# Altium PCB MotherBoard.PcbDoc
Units mil, origin at the board's own origin, x right, y up, seen from the top; angles counter-clockwise.
Board outline 3937.01 x 3937.01 mil, 4 copper layers (Top Layer, GND, PWR, Bottom Layer), stack 23.756 mil thick; 54 components, 56 nets, 271 pads, 66 vias.
Unrouted connection lines stored in the file: 16.
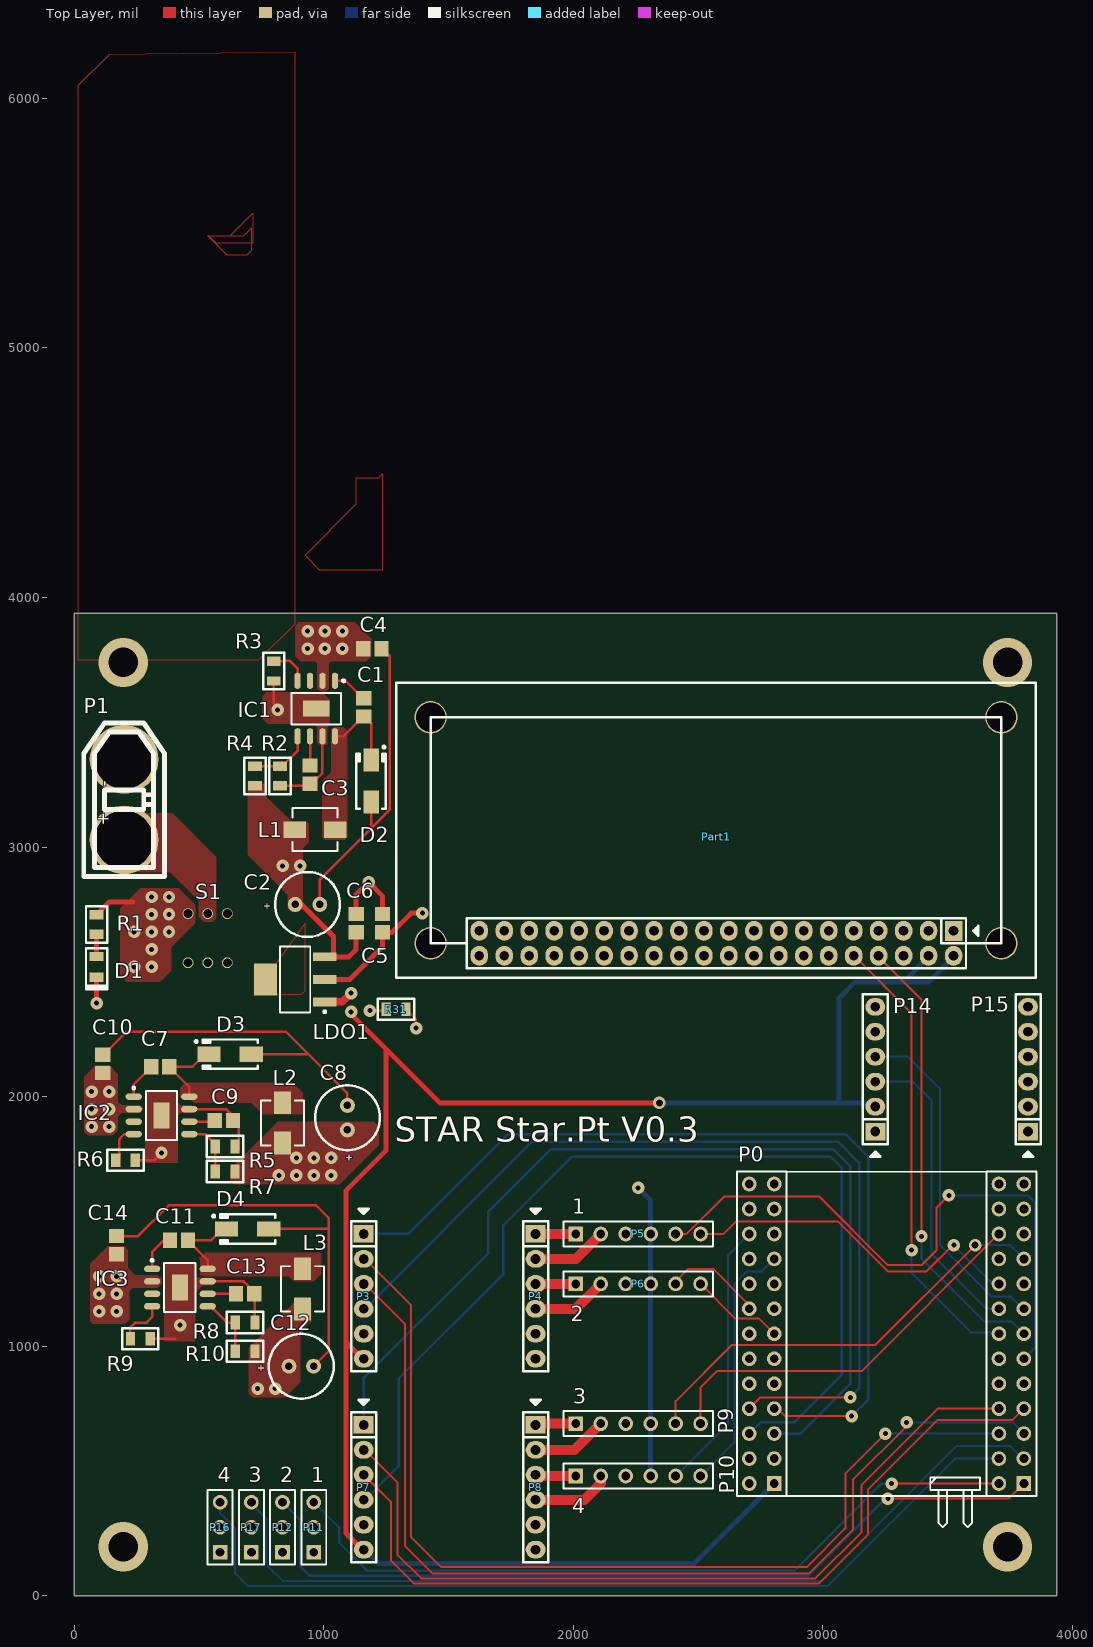
[diagram p0: Top Layer view]
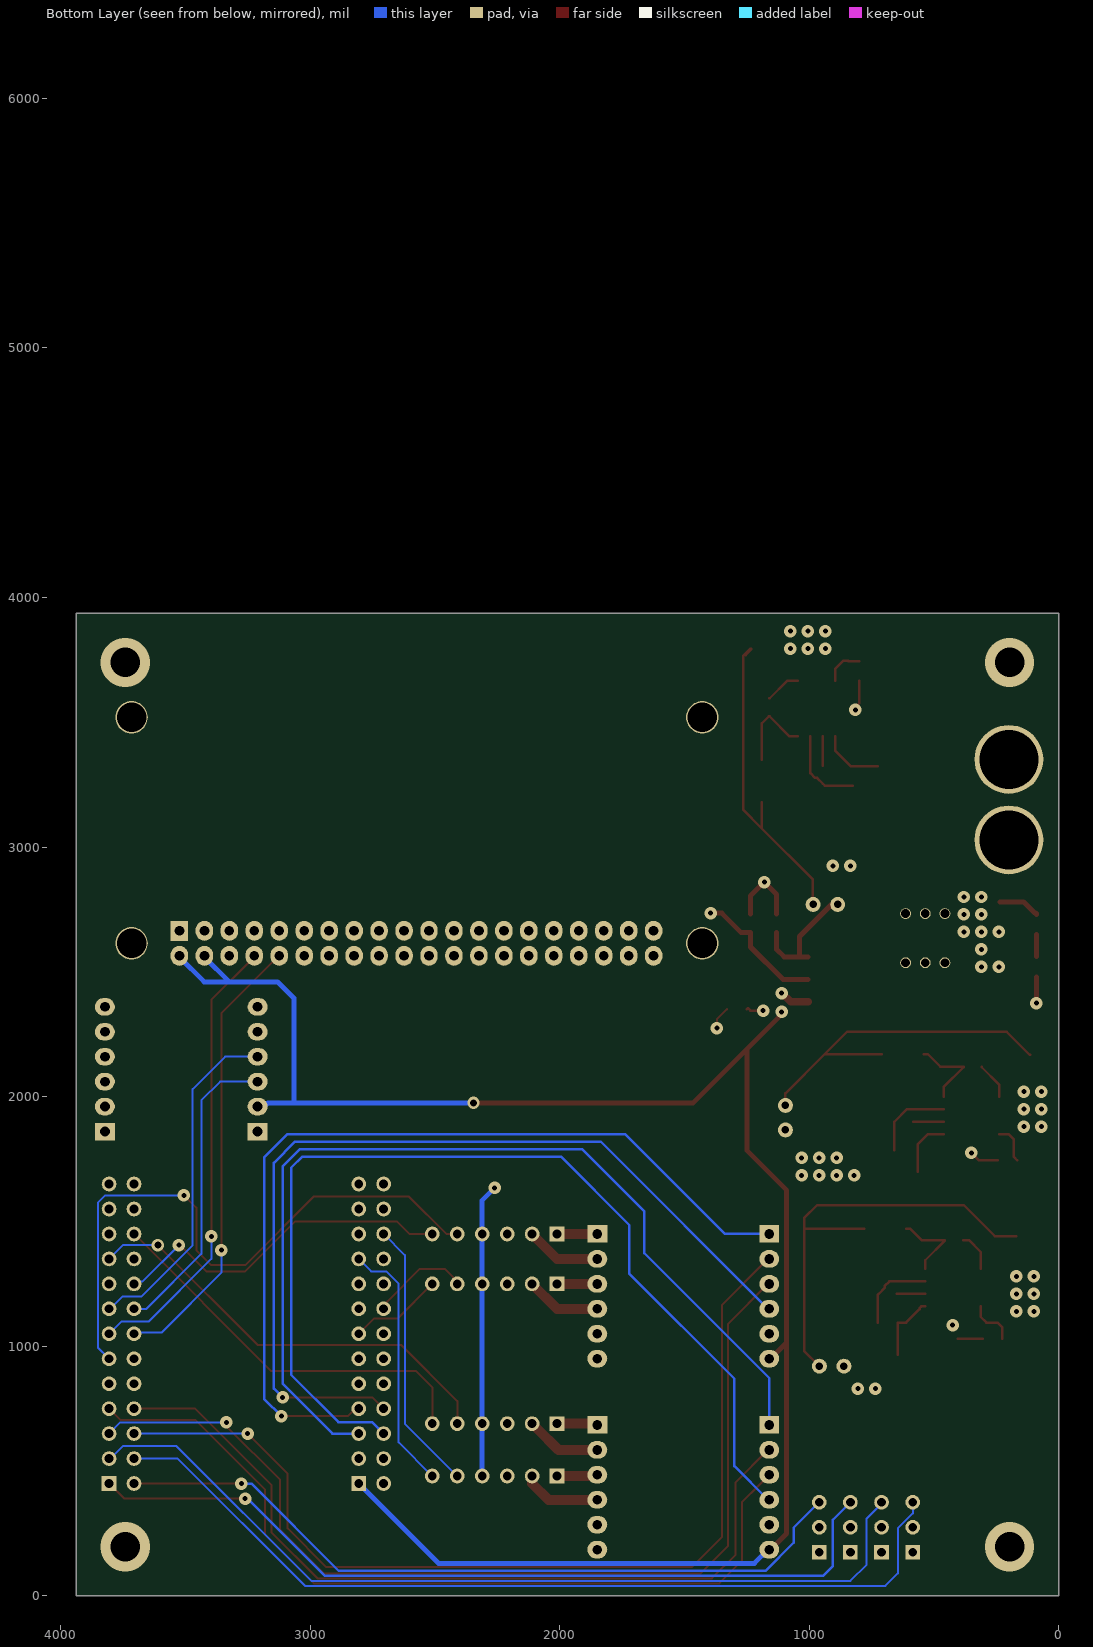
[diagram p1: Bottom Layer view, seen from below]
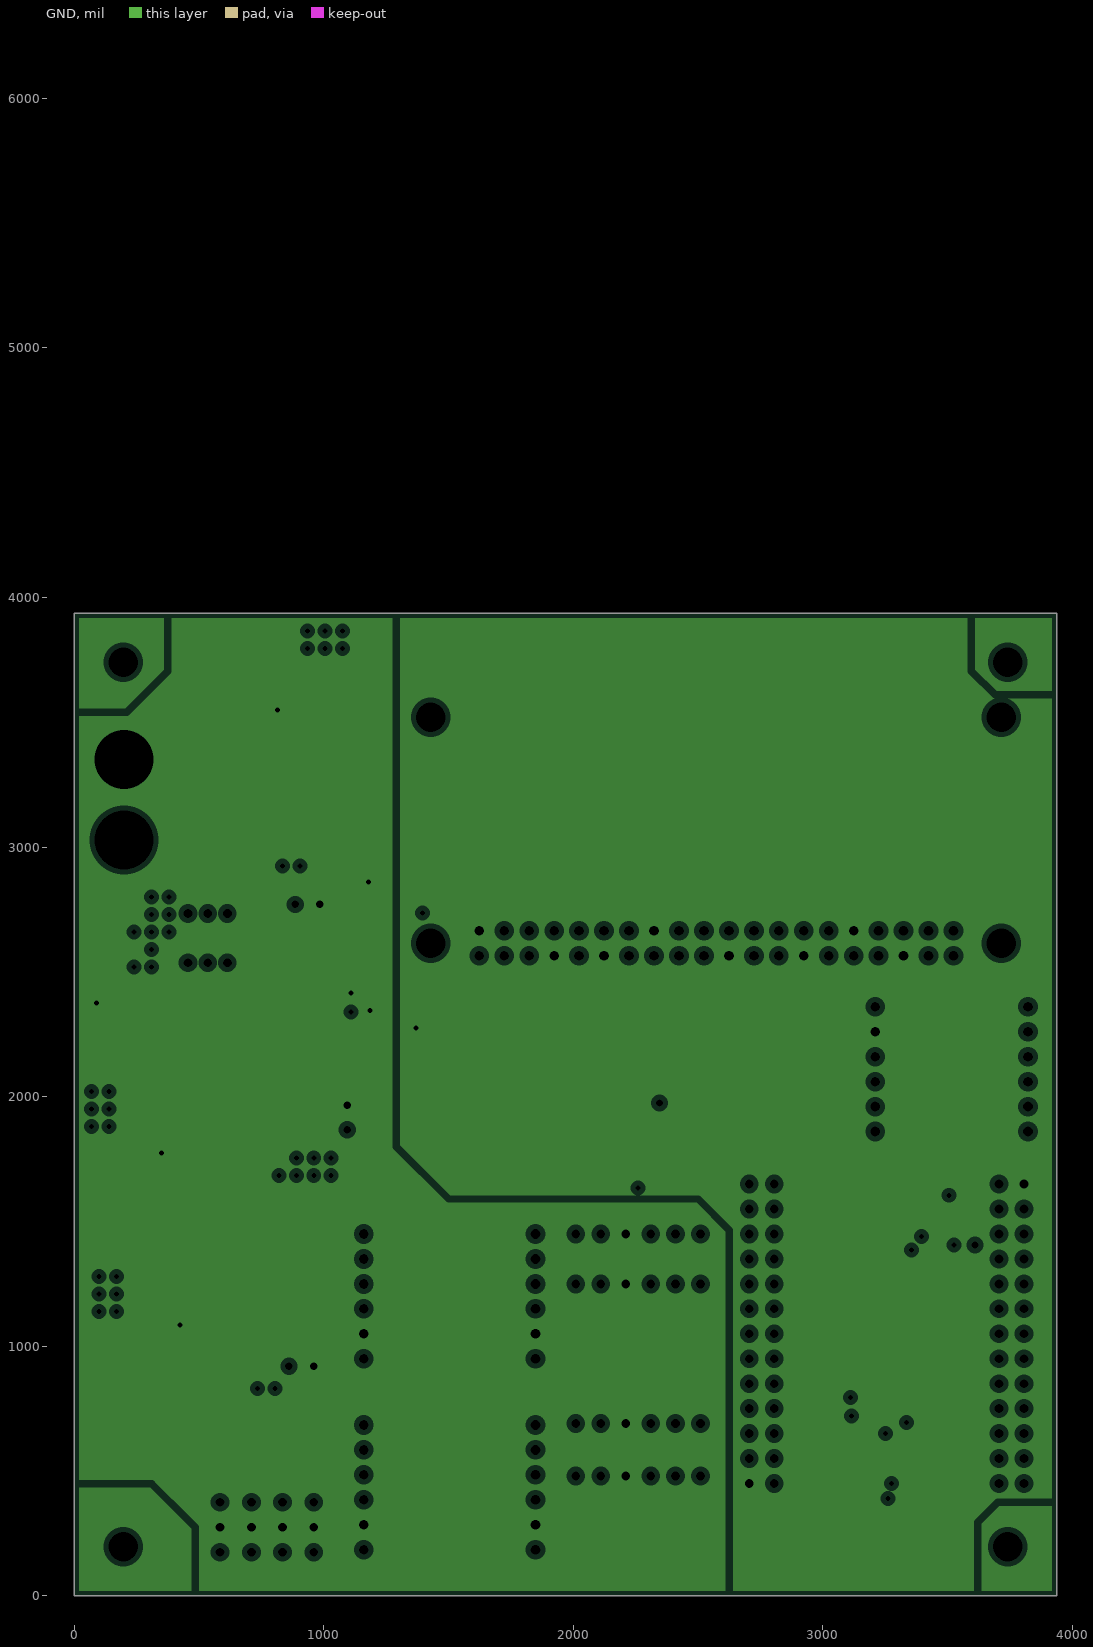
[diagram p2: GND, clearances drawn from the general rule]
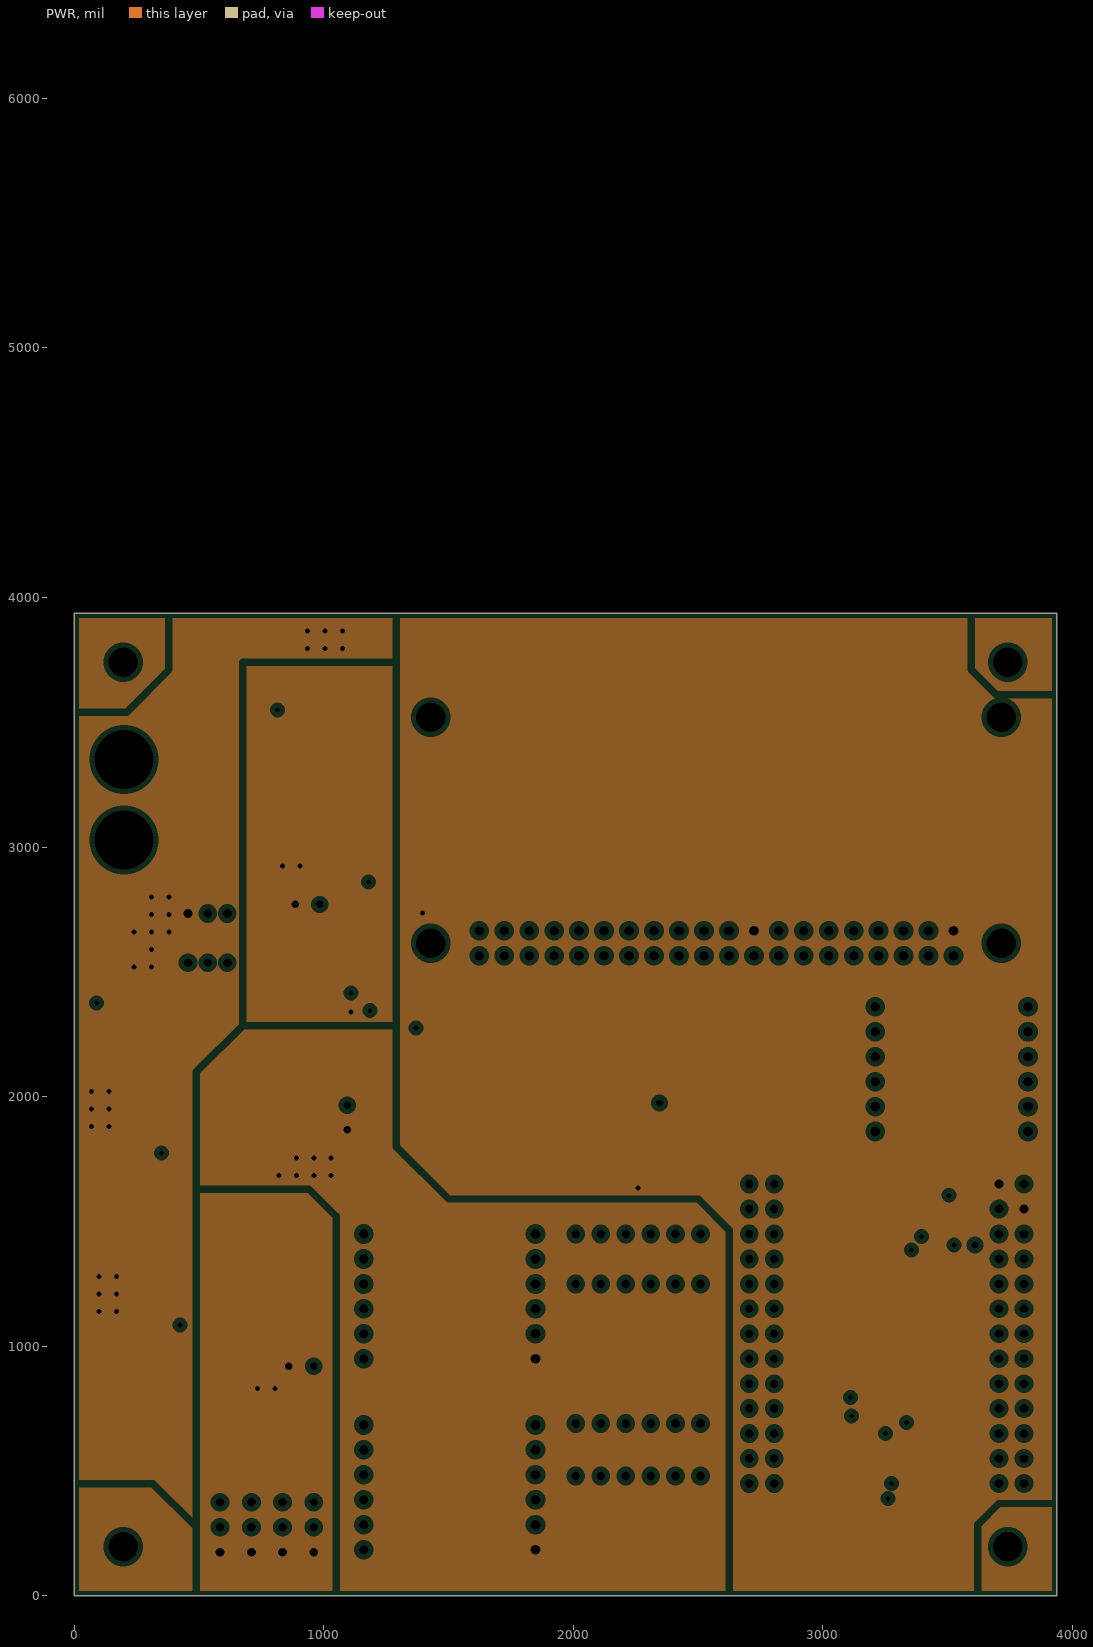
[diagram p3: PWR, clearances drawn from the general rule]
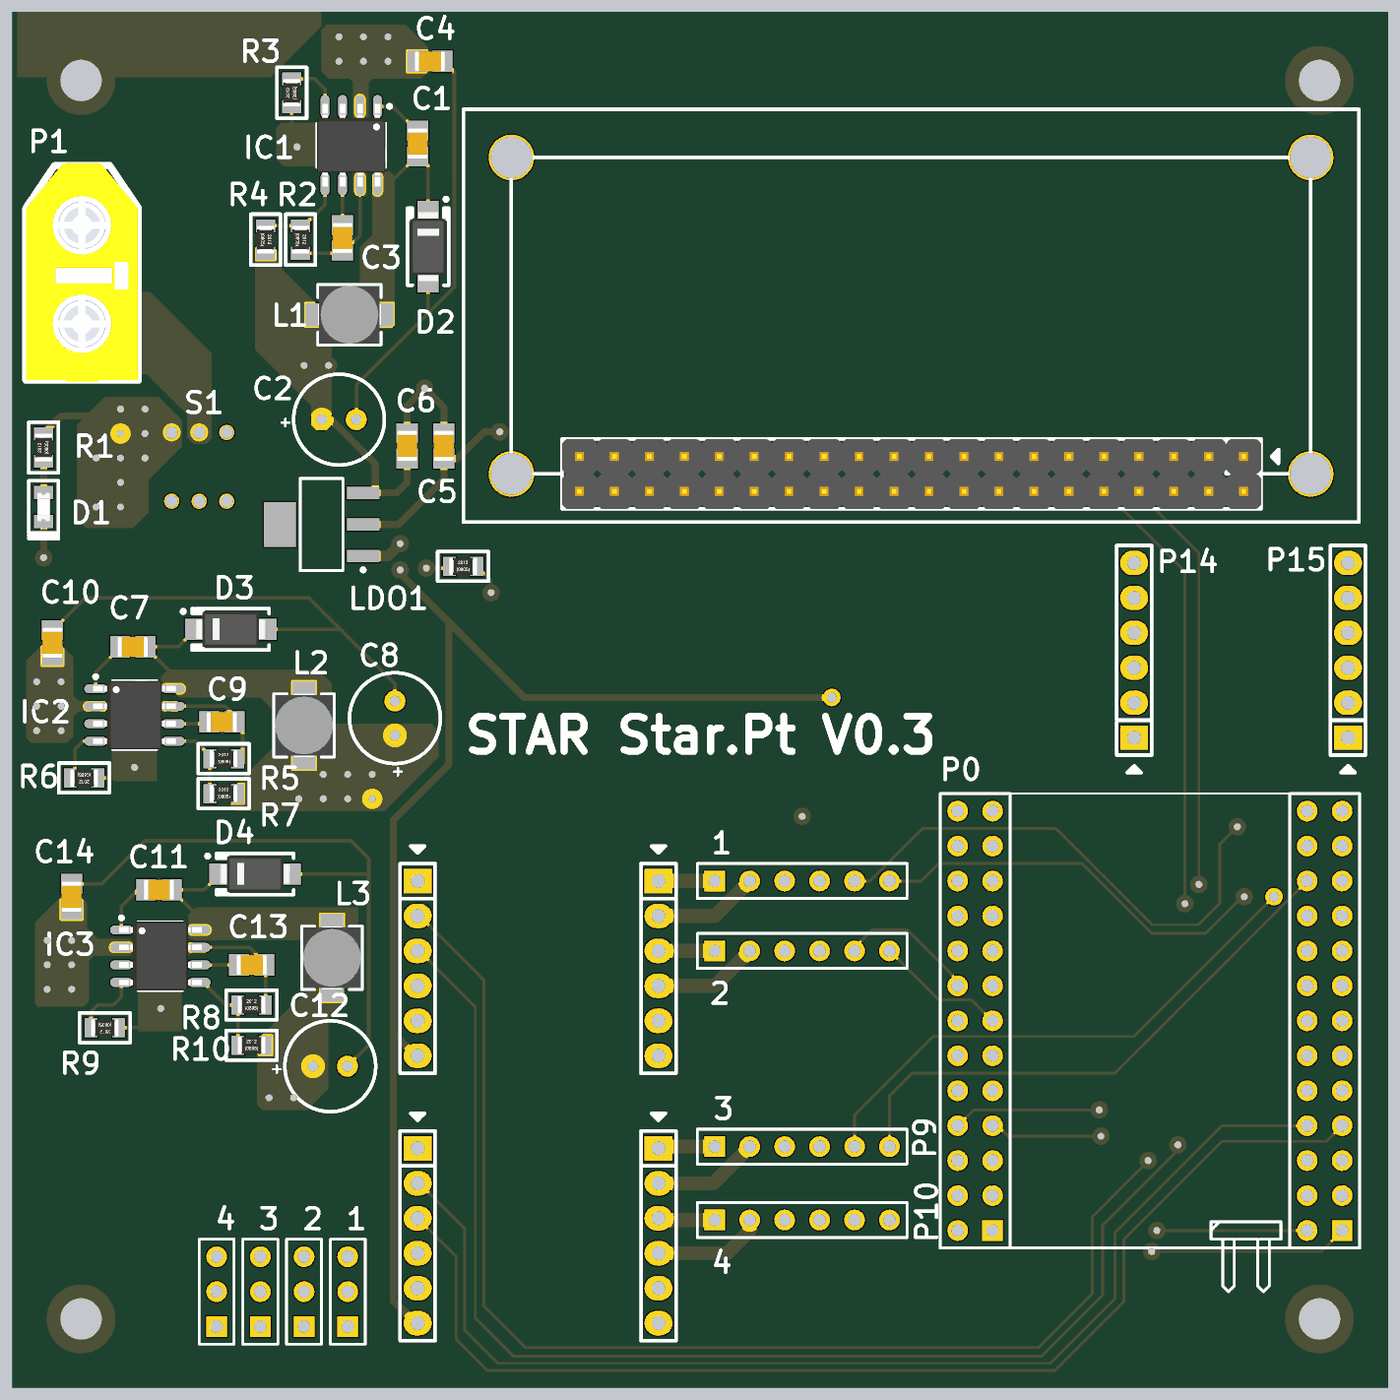
[diagram p4: 3D render of the assembled board from above, using the file's embedded part models]

## Layer stack, top to bottom
Top Solder: solder mask 0.4, Solder Resist, Dk 3.5
Top Layer: signal copper 1.4
Dielectric 2: prepreg 2.8, PP-006, Dk 4.1
GND: plane copper 1.378, net (Multiple Nets)
Dielectric 1: dielectric 12.6, FR-4, Dk 4.8
PWR: plane copper 1.378, net (Multiple Nets)
Dielectric 3: prepreg 2.8, PP-006, Dk 4.1
Bottom Layer: signal copper 1.4
Bottom Solder: solder mask 0.4, Solder Resist, Dk 3.5

## Board outline
0,0 3937.01,0 3937.01,3937.01 0,3937.01

## Design rules (kind name [scope] priority, off if disabled: settings)
Clearance [All] p1: gap=6 ignorepadtopadclearanceinfootprint=FALSE except(0: Arc-Hole Track-Hole SMDPad-Hole THPad-Hole Via-Hole Fill-Hole Poly-Hole Region-Hole Text-Hole)
HoleSize [All] p1: absolutevalues=TRUE maxlimit=300 minlimit=12 maxpercent=80.000 minpercent=20.000
HoleToHoleClearance [All] p1: gap=6 allowstackedmicrovias=TRUE
MinimumSolderMaskSliver [All] p1: minsoldermaskwidth=6
PlaneClearance [All] p1: clearance=20
PlaneConnect [All] p1: planeconnectstyle=Direct reliefexpansion=20 reliefentries=4 reliefconductorwidth=10 reliefairgap=10
PolygonConnect [All] p1: connectstyle=Direct reliefconductorwidth=10 reliefentries=4 polygonreliefangle="90 Angle" airgapwidth=10
RoutingVias [All] p1: holewidth=12 width=20 viastyle="Through Hole" minholewidth=12 minwidth=20 maxholewidth=150 maxwidth=150
SilkToSilkClearance [All] p1: silktosilkclearance=0
SilkToSolderMaskClearance [IsPad] p1: minsilkscreentomaskgap=0 clearancetoexposedcopper=TRUE
SolderMaskExpansion [All] p1: expansion=4 istentingtop=FALSE
UnRoutedNet [All] p1: checkbadconnections=TRUE
Width [All] p1: maxlimit=50 minlimit=8 preferedwidth=8 minimp=50.000000 maximp=50.000000 favimp=50.000000
22 further rules are at their usual default settings.

## Components (designator, comment, footprint, x,y, rotation, side; value= is the part's Value field where it differs from the comment)
C1 "0.1uF" CAPC2012X10M 1160,3560 r270 top
C2 "120uF" "CAP 6.3x15" 935,2770 r0 top
C3 "22nF" CAPC2012X10M 945,3290 r270 top
C4 "100nF" CAPC2012X10M 1195,3795 r180 top
C5 "10uF" CAPC2012X10M 1235,2695 r270 top
C6 "10uF" CAPC2012X10M 1130,2695 r270 top
C7 "0.1uF" CAPC2012X10M 345,2120 r0 top
C8 "120uF" "CAP 6.3x15" 1095,1915.79 r90 top
C9 "22nF" CAPC2012X10M 600,1905 r0 top
C10 "100nF" CAPC2012X10M 115,2131.42 r270 top
C11 "0.1uF" CAPC2012X10M 420,1425 r0 top
C12 "120uF" "CAP 6.3x15" 910,920 r0 top
C13 "22nF" CAPC2012X10M 685,1210 r0 top
C14 "100nF" CAPC2012X10M 170,1405 r270 top
D1 "LED" LED-0805 90,2520 r270 top
D2 "DIODE SCHOTTKY" SMA 1190,3264.65 r90 top
D3 "DIODE SCHOTTKY" SMA 625,2170 r180 top
D4 "DIODE SCHOTTKY" SMA 695,1470 r180 top
IC1 "LMR14050SDDA" SOP127P600X170_HS-9M 970,3555 r270 top
IC2 "LMR14050SDDA" SOP127P600X170_HS-9M 350,1925 r0 top
IC3 "LMR14050SDDA" SOP127P600X170_HS-9M 423.78,1235 r0 top
L1 "10uH" INDP4442X20M 965,3070 r180 top
L2 "10uH" INDP4442X20M 835,1895 r270 top
L3 "10uH" INDP4442X20M 915,1230 r270 top
LDO1 "AMS1117 3.3V" SOT230P700X180-4M 885,2470 r180 top
P0 "MHDR2X26" PCBComponent_1 3255,1050 r0 top locked
P1 "XT60" XT60H-F 200,3190 r270 top
P3 "MHDR1X6" MPIN-6-2.54-1.0 1160,1200 r270 top
P4 "MHDR1X6" MPIN-6-2.54-1.0 1849,1200 r270 top
P5 "Header 6" HDR1X6 2010,1450 r0 top
P6 "Header 6" HDR1X6 2010,1250 r0 top
P7 "MHDR1X6" MPIN-6-2.54-1.0 1160,435 r270 top
P8 "MHDR1X6" MPIN-6-2.54-1.0 1849,435 r270 top
P9 "Header 6" HDR1X6 2010,690 r0 top
P10 "Header 6" HDR1X6 2010,480 r0 top
P11 "Header 3" HDR1X3 960,175 r90 top
P12 "Header 3" HDR1X3 835,175 r90 top
P14 "MHDR1X6" MPIN-6-2.54-1.0 3210,2110 r90 top
P15 "MHDR1X6" MPIN-6-2.54-1.0 3821.81,2110 r90 top
P16 "Header 3" HDR1X3 585,175 r90 top
P17 "Header 3" HDR1X3 710,175 r90 top
Part1 "Zero2W" Zero2W 2573.27,2614.49 r0 top
R1 "5.7K" 0805 90,2690 r90 top
R2 "1K" 0805 825,3285 r270 top
R3 "84.5K" 0805 800,3705 r90 top
R4 "5.7K" 0805 725,3285 r270 top
R5 "1K" 0805 605,1800 r0 top
R6 "84.5K" 0805 205.63,1745 r180 top
R7 "15K" 0805 605,1700 r0 top
R8 "1K" 0805 685,1095 r0 top
R9 "84.5K" 0805 265,1030 r180 top
R10 "6.73K" 0805 685,980 r0 top
R31 "0R" 0805 1290,2350 r0 top
S1 "KFT DIP-7X7" "7X7 DIP" 535,2635 r90 top

## Footprints (in the part's own frame and the unit in brackets; to place one, negate y for a bottom-side part, rotate by r counter-clockwise, add the part's x,y. Pads: shape width x height; smd on the part's side, far side on the other; paste and mask are expansions set on the pad)
"7X7 DIP" [mm]
  round 1.1 hole 0.9: 1(2.5,2) 2(2.5,0) 3(2.5,-2) 4(-2.5,-2) 5(-2.5,0) 6(-2.5,2)
  body extent -3,-3 3,3, height 12
0805 [mm] "SMD, 0805"
  rect 0.95x1.4 smd: 1(-1,0) 2(1,0)
  silkscreen extent -1.85,-1.08 1.85,1.08, body extent -1,-0.62 1,0.63, height 0.45
"CAP 6.3x15" [mil]
  round 60 hole 30: 1(-49.21,0) 2(49.21,0)
  silkscreen extent -130,-130 130,130, body extent -124,-124 124,124, height 591
CAPC2012X10M [mm] "Chip Capacitor, 2-Leads, Body 2.00x1.25mm, IPC Low Density"
  rect 1.45x1.55 smd: 1(-0.925,0) 2(0.925,0)
  body extent -1.1,-0.72 1.1,0.72, height 1
HDR1X3 [mm] "Connector; Header; 3 Position"
  rect 1.5x1.5 hole 0.9: 1(0,0)
  round 1.5 hole 0.9: 2(2.54,0) 3(5.08,0)
  silkscreen extent -1.27,-1.27 6.35,1.27
HDR1X6 [mm] "Connector; Header; 6 Position"
  rect 1.5x1.5 hole 0.9: 1(0,0)
  round 1.5 hole 0.9: 2(2.54,0) 3(5.08,0) 4(7.62,0) 5(10.16,0) 6(12.7,0)
  silkscreen extent -1.27,-1.27 13.97,1.27
INDP4442X20M [mm] "Precision Wire Wound Inductor, 2-Leads, Body 4.40x4.20mm, IPC Low Density"
  rect 2.3x1.7 smd: 1(-2.05,0) 2(2.05,0)
  silkscreen extent -2.3,-2.2 2.3,2.2, body extent -2.3,-2.1 2.3,2.1, height 2.1
LED-0805 [mm] "LED, SMD, 0805"
  rect 0.95x1.4 smd: 1(-1.05,0) 2(1.05,0)
  silkscreen extent -1.9,-1.08 2.3,1.08, body extent -1.03,-0.46 1.03,0.45, height 0.85
MPIN-6-2.54-1.0 [mil] "MHDR"
  rect 70x80 hole 39.37: 1(-250,0)
  oval 70x80 hole 39.37: 2(-150,0) 3(-50,0) 4(50,0) 5(150,0) 6(250,0)
  silkscreen extent -350,-50 300,50, body extent -295,-39 295,39, height 394
PCBComponent_1 [mm]
  round 1.5 hole 0.9: 1(-13.97,15.24) 2(-11.43,15.24) 3(-13.97,12.7) 4(-11.43,12.7) 5(-13.97,10.16) 6(-11.43,10.16) 7(-13.97,7.62) 8(-11.43,7.62) 9(-13.97,5.08) 10(-11.43,5.08) 11(-13.97,2.54) 12(-11.43,2.54) 13(-13.97,0) 14(-11.43,0) 15(-13.97,-2.54) 16(-11.43,-2.54) 17(-13.97,-5.08) 18(-11.43,-5.08) 19(-13.97,-7.62) 20(-11.43,-7.62) 21(-13.97,-10.16) 22(-11.43,-10.16) 23(-13.97,-12.7) 24(-11.43,-12.7) 25(-13.97,-15.24) 27(11.43,15.24) 28(13.97,15.24) 29(11.43,12.7) 30(13.97,12.7) 31(11.43,10.16) 32(13.97,10.16) 33(11.43,7.62) 34(13.97,7.62) 35(11.43,5.08) 36(13.97,5.08) 37(11.43,2.54) 38(13.97,2.54) 39(11.43,0) 40(13.97,0) 41(11.43,-2.54) 42(13.97,-2.54) 43(11.43,-5.08) 44(13.97,-5.08) 45(11.43,-7.62) 46(13.97,-7.62) 47(11.43,-10.16) 48(13.97,-10.16) 49(11.43,-12.7) 50(13.97,-12.7) 51(11.43,-15.24)
  rect 1.5x1.5 hole 0.9: 26(-11.43,-15.24) 52(13.97,-15.24)
  silkscreen extent -15.24,-19.68 15.24,16.51, body extent -15.11,-16.51 15.11,16.38, height 15
SMA [mm] "DO-214AC"
  rect 2.35x1.55 smd: 1(-2.15,0) 2(2.15,0)
  silkscreen extent -2.8,-1.5 3.58,1.5, body extent -2.6,-1.3 2.6,1.3, height 2.64
SOP127P600X170_HS-9M [mm] "SOP, 8-Leads, Body 4.90x3.90mm, Pitch 1.27mm, Thermal Pad 2.65x1.65mm, IPC Low Density"
  oval 1.65x0.65 smd: 1(-2.825,1.905) 2(-2.825,0.635) 3(-2.825,-0.635) 4(-2.825,-1.905) 5(2.825,-1.905) 6(2.825,-0.635) 7(2.825,0.635) 8(2.825,1.905)
  rect 1.65x2.65 smd: 9(0,0)
  silkscreen extent -2.95,-2.5 1.6,2.91, body extent -3,-2.5 3,2.5, height 1.7
SOT230P700X180-4M [mm] "SOT223, 4-Leads, Body 6.50x7.00mm (avg), Pitch 2.30mm, IPC Low Density"
  rect 2.35x0.9 smd: 1(-3.025,2.3) 2(-3.025,0) 3(-3.025,-2.3)
  rect 2.35x3.25 smd: 4(3.025,0)
  silkscreen extent -3.15,-3.35 1.55,3.42, body extent -1.85,-3.35 1.85,3.35, height 1.8
XT60H-F [mm] "XT60H-锟斤拷头-锟斤拷锟斤拷"
  round 7 hole 6: 1(-4.1,0) 2(4.1,0)
  silkscreen extent -7.8,-4.1 7.8,4.1, body extent -8,-4.09 7.9,4.06, height 16.5
Zero2W [mil]
  round 129.92 hole 118.11: 0(-1145,0) 0(-1145,905.51) 0(1141.73,0) 0(1141.73,905.51)
  rect 70x80 hole 39.37: 1(950,50)
  oval 70x80 hole 39.37: 2(950,-50) 3(850,50) 4(850,-50) 5(750,50) 6(750,-50) 7(650,50) 8(650,-50) 9(550,50) 10(550,-50) 11(450,50) 12(450,-50) 13(350,50) 14(350,-50) 15(250,50) 16(250,-50) 17(150,50) 18(150,-50) 19(50,50) 20(50,-50) 21(-50,50) 22(-50,-50) 23(-150,50) 24(-150,-50) 25(-250,50) 26(-250,-50) 27(-350,50) 28(-350,-50) 29(-450,50) 30(-450,-50) 31(-550,50) 32(-550,-50) 33(-650,50) 34(-650,-50) 35(-750,50) 36(-750,-50) 37(-850,50) 38(-850,-50) 39(-950,50) 40(-950,-50)
  silkscreen extent -1283,-138 1280,1043, body extent -1000,-100 1000,100, height 398

## Part data
C1: library part Cap, "Capacitor 0.1uF", LatestRevisionDate=17-Jul-2002, LatestRevisionNote="Re-released for DXP Platform.", PackageDescription="Radial Cap, Thru-Hole; 2 Leads; 0.3 in Pin Spacing", PackageReference=RAD-0.3, Published=8-Jun-2000, Publisher="Altium Limited"
C2 C8 C12: library part "Cap Pol", "Polarized Capacitor (Radial)", LatestRevisionDate=17-Jul-2002, LatestRevisionNote="Re-released for DXP Platform.", PackageDescription="Polarized Capacitor (Radial); 2 Leads", PackageReference=RB7.6-15, Published=8-Jun-2000, Publisher="Altium Limited"
C3 C4 C5 C6 C7 C9 C10 C11 C13 C14: library part Cap, "Capacitor", LatestRevisionDate=17-Jul-2002, LatestRevisionNote="Re-released for DXP Platform.", PackageDescription="Radial Cap, Thru-Hole; 2 Leads; 0.3 in Pin Spacing", PackageReference=RAD-0.3, Published=8-Jun-2000, Publisher="Altium Limited"
D2 D3 D4: "肖特基二极管"
L1 L2 L3: library part Inductor, "Inductor", Code_IEC=1005, Code_JEITA=0402, LatestRevisionDate=29-May-2009, LatestRevisionNote="IPC-7351 Footprint Added.", PackageDescription="Chip Inductor", PackageReference=0402-A, Published=8-Jun-2000, Publisher="Altium Limited"
P0: "Header, 52-Pin, Dual row", LatestRevisionDate=17-Jul-2002, LatestRevisionNote="Re-released for DXP Platform.", Publisher="Altium Limited"
P3 P4 P5 P6 P7 P8 P9 P10 P14 P15: "Header, 6-Pin", LatestRevisionDate=17-Jul-2002, LatestRevisionNote="Re-released for DXP Platform.", Publisher="Altium Limited"
P11 P12 P16 P17: "Header, 3-Pin", LatestRevisionDate=17-Jul-2002, LatestRevisionNote="Re-released for DXP Platform.", Publisher="Altium Limited"
R1 R2 R3 R4 R5 R6 R7 R8 R9 R10 R31: library part Res, "Resistor", LatestRevisionDate=17-Jul-2002, LatestRevisionNote="Re-released for DXP Platform.", PackageDescription="Axial Device, Thru-Hole; 2 Leads; 0.4 in Pin Spacing", PackageReference=AXIAL-0.4, Published=8-Jun-2000, Publisher="Altium Limited"

## Via types
v1: diameter 50/50 (per signal layer), hole 20, Top Layer to Bottom Layer, tented both sides, 58 vias
v2: diameter 196.85, hole 118.11, Top Layer to Bottom Layer, tented both sides, 4 vias
v3: diameter 50, hole 28, Top Layer to Bottom Layer, 2 vias
v4: diameter 50/50 (per signal layer), hole 20, Top Layer to Bottom Layer, 2 vias

## Nets (pads, with @x,y where several pads share a name; then routed paths per layer and width w, separated by ;. In a path a pad name is that pad's centre, name@x,y a point inside that pad or via, vN(x,y) a via of type N, cw(c..) or ccw(c..) an arc to the next point about the centre after c; other vN are vias at no path point)
+3.3: C5.2 LDO1.2 P0.27 P0.30 P5.4 P6.4 P9.4 P10.4 Part1.1 Part1.17 | length 1710.7
  Top Layer w20: LDO1.2 1105,2470 1235,2600 C5.2 1273.58,2658.58 1350,2735 v1(1395,2735)
  Bottom Layer w20: v1(2260,1635) 2310,1585 P5.4 P6.4 P9.4 P10.4
+5: C2.1 C6.2 L1.2 LDO1.3 P0.26 P3.6 P7.6 P14.2 Part1.2 Part1.4 R4.2 | length 7844.2
  Top Layer w20: C2.1@910.79,2770 1039.09,2641.69 LDO1.3@1039.09,2565 ; LDO1.3 1100.55,2560.55 1130,2590 C6.2 ; v1(1110,2340) 1110,2330 1250,2190 ; P3.6 1155,950 1090,1015 ; P7.6@1165,185 P7.6 1155,185 1090,250 1090,1015 ; v3(2345,1975) 1465,1975 1250,2190 ; P14.2@3200.43,1969.57 P14.2 ; 1090,1015 1090,1625 1250,1785 1250,2190
  Bottom Layer w20: P7.6 1165,185 1220,130 2485,130 P0.26 ; v3(2345,1975) 3065,1975 ; P14.2 3200.43,1969.57 3173.72,1969.57 3168.28,1975 3065,1975 ; Part1.4 3423.27,2559.49 3323.78,2460 ; Part1.2 3523.27,2559.49 3423.78,2460 3323.78,2460 ; 3065,1975 3065,2395 3130,2460 3323.78,2460
  other v1: 835,2925 905,2925
+6: C12.1 L3.2 P11.1 P12.1 P16.1 P17.1 R10.2
  other v1: 735,830 805,830
+12: C8.1 L2.2 P4.6 P8.6 R7.2
  other v1: 820,1685 890,1685 960,1685 890,1755 960,1755 1030,1755
  other v4: 1030,1685
"+14.7 BAT": C4.2 C10.2 C14.2 IC1.2 IC2.2 IC3.2 R1.2 S1.1 | length 168.2
  Top Layer w20: R1.2 90,2733.11 92.56,2735.67 96.3,2735.67 140.63,2780 235,2780
  other v1: 100,1140 170,1140 100,1210 170,1210 100,1280 170,1280 70,1880 140,1880 70,1950 140,1950 70,2020 140,2020 240,2520 310,2520 310,2590 240,2660 310,2660 380,2660 380,2730 310,2800 380,2800 935,3795 1005,3795 1075,3795 935,3865 1005,3865 1075,3865
  other v4: 310,2730
F103_UART4_RX: P0.40 Part1.8 | length 1819.9
  Top Layer w8: Part1.8 3223.27,2559.49 3395,2387.76 v1(3395,1440)
  Bottom Layer w8: v1(3395,1440) 3395,1350 3645,1100 3755,1100 P0.40
F103_UART4_TX: P0.39 Part1.10 | length 1818.3
  Top Layer w8: Part1.10 3125.51,2564.49 3355,2335 v1(3355,1385)
  Bottom Layer w8: v1(3355,1385) 3355,1295 3595,1055 3700,1055 P0.39
F103_UART5_RX: P0.38 P14.4 | length 1379.5
  Bottom Layer w8: P14.4 3340,2160 3470,2030 3470,1405 3675,1200 3750,1200 3800,1150 P0.38
F103_UART5_TX: P0.37 P14.3 | length 1232.2
  Bottom Layer w8: P14.3 3360,2060 3435,1985 3435,1370 3655,1150 P0.37
GND: P0.25 P0.28 P14.5 Part1.6 Part1.9 Part1.14 Part1.20 Part1.25 Part1.30 Part1.34 Part1.39 R31.2 | length 93.1
  Top Layer w8: R31.2 1330,2350.63 1370,2310.63 v1(1370,2275)
MOTOR1+: P4.1 P5.1 | length 161
  Top Layer w40: P4.1 P5.1
MOTOR1-: P4.2 P5.2 | length 302.4
  Top Layer w40: P4.2 2010,1350 P5.2
MOTOR2+: P4.3 P6.1 | length 161
  Top Layer w40: P4.3 P6.1
MOTOR2-: P4.4 P6.2 | length 302.4
  Top Layer w40: P4.4 2010,1150 P6.2
MOTOR3+: P8.1 P9.1 | length 143.1
  Top Layer w40: P8.1 1854,690 P9.1@1990,690
MOTOR3-: P8.2 P9.2 | length 276.2
  Top Layer w40: P8.2 2005,585 P9.2@2090,670
MOTOR4+: P8.3 P10.1 | length 148.1
  Top Layer w40: P8.3 1854,480 P10.1@1995,480
MOTOR4-: P8.4 P10.2 | length 302.9
  Top Layer w40: P8.4 2045,385 2110,450 P10.2@2110,465
MOTOR-DIR1: P0.20 P3.1 | length 3614.4
  Top Layer w8: P0.20 2818.82,750 2848.82,720 v1(3115,720)
  Bottom Layer w10: P3.1 1337.5,1450 1737.5,1850 3090,1850 3182.5,1757.5 3182.5,787.5 v1(3115,720)
MOTOR-DIR2: P0.19 P3.4 | length 3675.9
  Top Layer w8: P0.19 2750,795 v1(3110,795)
  Bottom Layer w10: P3.4 1165,1150 1835,1820 3060,1820 3145,1735 3145,830 v1(3110,795)
MOTOR-DIR3: P0.22 P7.1 | length 3902.5
  Bottom Layer w10: P7.1 1160,872.5 1660,1372.5 1660,1540 1910,1790 3040,1790 3110,1720 3110,850 2910,650 P0.22
MOTOR-DIR4: P0.21 P7.4 | length 4120.3
  Bottom Layer w10: P7.4 1165,385 1300,520 1300,870 1720,1290 1720,1485 1995,1760 3030.91,1760 3075,1715.91 3075,885 2886.3,696.3 2751.3,696.3 P0.21
NetC1_1: C1.1 IC1.1 | length 143.9
  Top Layer w10: IC1.1 1088.23,3666.22 1158.03,3596.42 C1.1
NetC1_2: C1.2 D2.2 IC1.8 L1.1 | length 335.9
  Top Layer w10: IC1.8 1078.23,3443.78 1158.03,3523.58 C1.2 1161.97,3523.58 1190,3495.55 D2.2
NetC3_1: C3.1 IC1.6 | length 117.4
  Top Layer w10: C3.1 IC1.6
NetC7_1: C7.1 IC2.1 | length 148.9
  Top Layer w10: IC2.1 238.78,2048.23 308.58,2118.03 C7.1
NetC7_2: C7.2 D3.2 IC2.8 L2.1 | length 332.7
  Top Layer w10: IC2.8 461.22,2038.23 381.42,2118.03 C7.2 474.61,2120 524.61,2170 D3.2
NetC9_1: C9.1 IC2.6 | length 122.4
  Top Layer w10: IC2.6 C9.1@583.58,1900
NetC11_1: C11.1 IC3.1 | length 158.2
  Top Layer w10: IC3.1 312.56,1377.56 360,1425 C11.1
NetC11_2: C11.2 D4.2 IC3.8 L3.1 | length 320.1
  Top Layer w10: IC3.8 535,1344.45 456.42,1423.03 C11.2 549.61,1425 594.61,1470 D4.2
NetC13_1: C13.1 IC3.6 | length 113.6
  Top Layer w10: IC3.6 C13.1
NetD1_1: D1.1 R1.1 | length 89.3
  Top Layer w20: D1.1 R1.1
NetIC1_4: IC1.4 R3.2 | length 157.2
  Top Layer w10: R3.2 842.61,3744.37 844.09,3745.86 864.14,3745.86 895,3715 IC1.4
NetIC1_5: IC1.5 R2.1 R4.1 | length 253.6
  Top Layer w10: R4.1 R2.1 833.86,3324.37 895,3385.51 IC1.5
NetIC2_4: IC2.4 R6.2 | length 157.3
  Top Layer w10: R6.2 179.96,1758.7 179.96,1829.1 200.86,1850 IC2.4
NetIC2_5: IC2.5 R5.1 R7.1 | length 230.3
  Top Layer w10: IC2.5 524.49,1850 565.63,1808.86 R5.1 R7.1
NetIC3_4: IC3.4 R9.2 | length 192.4
  Top Layer w10: R9.2 225.63,1075.63 245,1095 290,1095 312.56,1117.56 IC3.4
NetIC3_5: IC3.5 R8.1 R10.1 | length 269.6
  Top Layer w10: IC3.5 550.47,1160 557.67,1152.8 557.67,1149.26 611.93,1095 R8.1 R10.1@645.63,965
NetP1_2: P1.2 S1.2
PGND: C2.2 C3.2 C4.1 C5.1 C6.1 C8.2 C9.2 C10.1 C12.2 C13.2 C14.1 D1.2 D2.1 D3.1 D4.1 IC1.7 IC1.9 IC2.7 IC2.9 IC3.7 IC3.9 LDO1.1 P1.1 P3.5 P4.5 P5.3 P6.3 P7.5 P8.5 P9.3 P10.3 P11.2 P12.2 P16.2 P17.2 R2.2 R3.1 R5.2 R6.1 R8.2 R9.1 R31.1 | length 6418.9
  Top Layer w10: C10.1 116.97,2167.84 209.13,2260 848.42,2260 938.42,2170 ; C14.1 256.42,1441.42 380,1565 968.43,1565 1020,1513.43 1020,1470 ; R6.1 320,1745 v1(350,1775) ; R9.1 405,1030 ; IC2.7 608.38,1950 659.37,1899.01 R5.2@659.37,1785 ; IC3.7 678.85,1260 697.87,1240.98 697.87,1233.54 C13.2 724.37,1207.05 R8.2 ; D3.1 938.42,2170 ; D4.1 1020,1470 ; R3.1 800,3575.82 815,3560.82 v1(815,3550) ; R2.2 937.05,3245.63 C3.2 968.54,3277.13 975.98,3277.13 995,3296.15 IC1.7 ; C12.2 1020,980.79 1020,1470 ; C2.2@985,2760 985,2870 1190,3075 ; C8.2 1095,2013.42 938.42,2170 ; v1(1185,2345) 1235.63,2345 1245.63,2355 R31.1 ; D2.1 1190,3075 ; C4.1 1231.42,3793.03 C4.1@1254.96,3769.49 ; C4.1@1235,3795 1265,3765 1265,3150 1190,3075
  Top Layer w20: v1(90,2375) D1.2 ; C6.1 1130,2810 v1(1180,2860) 1235,2805 C5.1
  Top Layer w30: LDO1.1 1074.45,2379.45 v1(1110,2415)
  other v1: 425,1085
PWM-TIM8-CH1(SERVO1): P0.51 P11.3 | length 3039.1
  Top Layer w8: v1(3275,450) P0.51
  Bottom Layer w10: P11.3 1062.17,272.83 1062.17,212.78 1174.95,100 2885,100 3235,450 v1(3275,450)
PWM-TIM8-CH2(SERVO2): P0.52 P12.3 | length 3353.8
  Top Layer w8: v1(3260,390) 3745,390 P0.52
  Bottom Layer w10: P12.3 905,305 905,120 945,80 2940,80 3250,390 v1(3260,390)
PWM-TIM8-CH3(SERVO3): P0.49 P16.3 | length 3601.8
  Bottom Layer w8: P16.3 585,330.9 645,270.9 645,90 695,40 3020,40 3530,550 P0.49
PWM-TIM8-CH4(SERVO4): P0.50 P17.3 | length 3581.2
  Bottom Layer w8: P17.3 710,370 770,310 770,125 835,60 2995,60 3535,600 3750,600 3800,550 P0.50
"TIM1-CH1 PWM MOTOR1": P0.47 P3.2 | length 3951.8
  Top Layer w8: P3.2 1165,1350 1350,1165 1350,235 1470,115 2935,115 3090,270 3090,490 v1(3250,650)
  Bottom Layer w8: v1(3250,650) P0.47
"TIM1-CH2 PWM MOTOR2": P0.48 P3.3 | length 4042
  Top Layer w8: P3.3 1165,1250 1325,1090 1325,200 1435,90 2945,90 3120,265 3120,465 3335,680 v1(3335,695)
  Bottom Layer w8: v1(3335,695) 3760,695 P0.48
"TIM1-CH3 PWM MOTOR3": P0.45 P7.2 | length 3321.2
  Top Layer w8: P7.2 1165,585 1295,455 1295,165 1390,70 2970,70 3155,255 3155,445 3460,750 P0.45
"TIM1-CH4 PWM MOTOR4": P0.46 P7.3 | length 3358.2
  Top Layer w8: P7.3 1200.82,444.18 1270,375 1270,140 1360,50 2985,50 3180,245 3180,425 3460,705 3760,705 P0.46
"TIM2-CH1 M1 CODER A": P0.42 P5.5 | length 2487.7
  Top Layer w8: P5.5 2454.1,1450 2604.1,1600 2985,1600 3260,1325 3395,1325 3455,1385 3455,1555 v1(3505,1605)
  Bottom Layer w8: v1(3505,1605) 3820,1605 3850,1575 3850,995 P0.42
"TIM2-CH2 M1 CODER B": P0.35 P5.6 | length 1406.2
  Top Layer w8: P5.6 2601.91,1450 2651.91,1500 3060,1500 3260,1300 3415,1300 3520,1405 v1(3525,1405)
  Bottom Layer w8: v1(3525,1405) 3670.23,1259.77 3695.23,1259.77 P0.35
"TIM3-CH1 M2 CODER A": P0.11 P6.5 | length 400.8
  Top Layer w8: P6.5 2410,1260 2460,1310 2560,1310 2691.14,1178.86 2691.14,1177.68 2705,1163.82 P0.11
"TIM3-CH2 M2 CODER B": P0.14 P6.6 | length 377.8
  Top Layer w8: P6.6 2649.53,1110.47 2744.53,1110.47 P0.14
"TIM4-CH1 M3 CODER A": P0.34 P9.5 | length 1766.7
  Top Layer w8: P9.5 2410,780 2635,1005 3210,1005 v3(3610,1405)
  Bottom Layer w8: v3(3610,1405) 3750,1405 P0.34
"TIM4-CH2 M3 CODER B": P0.31 P9.6 | length 1594.7
  Top Layer w8: P9.6 2510,835 2575,900 3155,900 P0.31
"TIM5-CH1 M4 CODER A": P0.5 P10.5 | length 1092.2
  Bottom Layer w8: P10.5 2620,690 2620,1365 P0.5
"TIM5-CH2 M4 CODER B": P0.8 P10.6 | length 1027.3
  Bottom Layer w8: P10.6 2645,615 2645,1250 2695,1300 2755,1300 P0.8
pads on no net: IC1.3 IC2.3 IC3.3 LDO1.4 P0.1 P0.2 P0.3 P0.4 P0.6 P0.7 P0.9 P0.10 P0.12 P0.13 P0.15 P0.16 P0.17 P0.18 P0.23 P0.24 P0.29 P0.32 P0.33 P0.36 P0.41 P0.43 P0.44 P14.1 P14.6 P15.1 P15.2 P15.3 P15.4 P15.5 P15.6 Part1.0 Part1.3 Part1.5 Part1.7 Part1.11 Part1.12 Part1.13 Part1.15 Part1.16 Part1.18 Part1.19 Part1.21 Part1.22 Part1.23 Part1.24 Part1.26 Part1.27 Part1.28 Part1.29 Part1.31 Part1.32 Part1.33 Part1.35 Part1.36 Part1.37 Part1.38 Part1.40 S1.3 S1.4 S1.5 S1.6
copper on no net:
  other v2: 196.85,196.85 3740.16,196.85 196.85,3740.16 3740.16,3740.16

## Polygon pours and split planes (outlines as drawn)
+6 on Top Layer "Top Layer-+7.4" (solid, pour order 130): 715,795 700,810 700,995 880,1175 950,1175 950,1100 905,1055 905,855 845,795
+12 on Top Layer "Top Layer-+12" (solid, remove dead copper, pour order 118): 1220,1805 1065,1650 640,1650 625,1665 625,1710 815,1900 1200,1900 1220,1880
NetP1_2 on Top Layer "Top Layer-NetP1_2" (solid, remove dead copper, pour order 114): 385,2900 500,2785 500,2720 520,2700 555,2700 570,2715 570,2960 395,3135 230,3135 195,3100 195,2965 260,2900
"+14.7 BAT" on Top Layer "Top Layer-+14.7 BAT" (solid, remove dead copper, pour order 110): 1190,3765 1190,3835 1125,3900 900,3900 885,3885 885,3765 905,3745 965,3745 975,3735 975,3635 985,3625 1010,3625 1020,3635 1020,3735 1030,3745 1170,3745
"+14.7 BAT" on Top Layer "Top Layer-+14.7 BAT 1" (solid, remove dead copper, pour order 108): 200,1400 135,1400 65,1330 65,1100 75,1090 205,1090 220,1105 220,1220 235,1235 245,1235 335,1235 350,1250 350,1270 335,1285 245,1285 215,1315 215,1385
"+14.7 BAT" on Top Layer "Top Layer-+14.7 BAT 2" (solid, remove dead copper, pour order 106): 140,2125 85,2125 40,2080 40,1860 55,1845 155,1845 175,1865 175,1920 190,1935 265,1935 275,1945 275,1955 265,1965 190,1965 175,1980 175,2090
"+14.7 BAT" on Top Layer "Top Layer-+14.7 BAT 3" (solid, remove dead copper, pour order 102): 486.14,2694.06 486.14,2768.86 420,2835 265,2835 185,2755 185,2485 210,2460 345,2460 390,2505 390,2597.91
+5 on Top Layer "Top Layer-+5" (solid, pour order 72): 855,2755 855,2810 695,2970 695,3262.5 710,3262.5 750,3262.5 770,3242.5 770,3202.5 780,3192.5 870,3102.5 930,3102.5 940,3092.5 940,3020 915,2995 915,2755 900,2740 870,2740
NetC7_2 on Top Layer "Top Layer-NetC7_2" (solid, pour order 26): 480,1975 710,1975 755,1930 915,1930 915,2015 875,2055 865,2055 445,2055 425,2035 425,1995 460,1995
NetC11_2 on Top Layer "Top Layer-NetC11_2" (solid, pour order 36): 515,1285 520,1280 860,1280 880,1260 960,1260 990,1290 990,1375 525,1375 500,1350 505,1345 505,1285
NetC1_2 on Top Layer "Top Layer-NetC1_2" (solid, pour order 50): 1080,3480 1095,3465 1095,3040 1085,3030 1005,3030 995,3040 995,3265 1030,3300 1030,3470 1040,3480
no net on Top Layer "Top Layer-No Net 3" (solid, shelved, pour order 90): 535,5450.2 680.2,5450.2 710,5480 710,5390 692.21,5372.21 612.99,5372.21
no net on Top Layer "Top Layer-No Net 5" (solid, shelved, pour order 86): 625.2,5450.2 715,5540 715,5420 577.67,5420 573.93,5416.26 539.99,5450.2
no net on Top Layer "Top Layer-No Net 2" (solid, shelved, pour order 78): 719.72,2409.54 909.54,2409.54 925,2425 925,2695
no net on Top Layer "Top Layer-No Net" (solid, shelved, pour order 66): 140,6175 15,6050 15,3750 740,3750 885,3895 885,6185
PGND on Top Layer "Top Layer-PGND" (solid, pour order 64): 1025,3490 1015,3480 1015,3410 985,3410 975,3420 975,3480 960,3495 775,3495 755,3515 755,3605 770,3620 995,3620 1025,3590
"+14.7 BAT" on Top Layer "Top Layer-No Net 1" (solid, shelved, pour order 48): 1235,4110 985,4110 925,4170 1130,4375 1130,4480 1220,4480 1235,4495
PGND on Top Layer "Top Layer-PGND 2" (solid, pour order 42): 360,1330 480,1330 485,1335 485,1275 550,1275 555,1270 555,1245 515,1245 485,1215 485,1020 360,1020
PGND on Top Layer "Top Layer-PGND 3" (solid, pour order 22): 415,1735 290,1735 285,1740 285,2020 290,2025 295,2020 415,2020 415,1975 425,1965 475,1965 475,1935 425,1935 415,1925
PGND on GND (split plane): 1274.93,1800 1275.22,1797.06 1276.07,1794.23 1277.47,1791.63 1279.34,1789.34 1489.34,1579.34 1491.63,1577.47 1494.23,1576.07 1497.06,1575.22 1500,1574.93 2493.76,1574.93 2609.93,1458.76 2609.93,955 2609.93,20.1 500.07,20.1 500.07,275 499.78,277.94 498.93,280.77 497.53,283.37 495.66,285.66 465.66,315.66 320.66,460.66 318.37,462.53 315.77,463.93 312.94,464.78 310,465.07 20.1,465.07 20.1,3524.93 210,3524.93 212.94,3525.22 215.77,3526.07 218.37,3527.47 220.66,3529.34 385.66,3694.34 387.53,3696.63 388.93,3699.23 389.78,3702.06 390.07,3705 390.07,3916.91 1274.93,3916.91
no net on GND (split plane): 359.93,3711.24 203.76,3555.07 20.1,3555.07 20.1,3916.91 359.93,3916.91
no net on GND (split plane): 444.34,294.34 469.93,268.76 469.93,20.1 20.1,20.1 20.1,434.93 303.76,434.93
GND on GND (split plane): 3579.93,3705 3580.22,3702.06 3581.07,3699.23 3582.47,3696.63 3584.34,3694.34 3679.34,3599.34 3681.63,3597.47 3684.23,3596.07 3687.06,3595.22 3690,3594.93 3916.91,3594.93 3916.91,390.07 3700,390.07 3697.06,389.78 3694.23,388.93 3691.63,387.53 3689.34,385.66 3609.34,305.66 3607.47,303.37 3606.07,300.77 3605.22,297.94 3604.93,295 3604.93,20.1 2640.07,20.1 2640.07,955 2640.07,1465 2639.78,1467.94 2638.93,1470.77 2637.53,1473.37 2635.66,1475.66 2510.66,1600.66 2508.37,1602.53 2505.77,1603.93 2502.94,1604.78 2500,1605.07 1506.24,1605.07 1305.07,1806.24 1305.07,3916.91 3579.93,3916.91
no net on GND (split plane): 3916.91,3625.07 3696.24,3625.07 3610.07,3711.24 3610.07,3916.91 3916.91,3916.91
no net on GND (split plane): 3916.91,20.1 3635.07,20.1 3635.07,288.76 3706.24,359.93 3916.91,359.93
no net on PWR (split plane): 346.84,396.84 431.84,311.84 474.34,269.34 474.93,268.86 474.93,20.1 20.1,20.1 20.1,434.93 308.76,434.93
+6 on PWR (split plane): 1034.93,1513.76 1034.93,20.1 505.07,20.1 505.07,450 505.07,710 505.07,1614.93 933.76,1614.93
no net on PWR (split plane): 364.93,3716.24 203.76,3555.07 20.1,3555.07 20.1,3916.91 364.93,3916.91
"+14.7 BAT" on PWR (split plane): 1274.93,3755.07 675,3755.07 672.06,3754.78 669.23,3753.93 666.63,3752.53 664.34,3750.66 662.47,3748.37 661.07,3745.77 660.22,3742.94 659.93,3740 659.93,2370 659.93,2291.24 479.34,2110.66 477.47,2108.37 476.07,2105.77 475.22,2102.94 474.93,2100 474.93,710 474.93,450 474.93,311.39 453.16,333.16 368.16,418.16 325.66,460.66 323.37,462.53 320.77,463.93 317.94,464.78 315,465.07 20.1,465.07 20.1,3524.93 210,3524.93 212.94,3525.22 215.77,3526.07 218.37,3527.47 220.66,3529.34 390.66,3699.34 392.53,3701.63 393.93,3704.23 394.78,3707.06 395.07,3710 395.07,3916.91 1274.93,3916.91
+12 on PWR (split plane): 1274.93,1800 1275.22,1797.06 1276.07,1794.23 1277.47,1791.63 1279.34,1789.34 1489.34,1579.34 1491.63,1577.47 1494.23,1576.07 1497.06,1575.22 1500,1574.93 2493.76,1574.93 2609.93,1458.76 2609.93,20.1 1065.07,20.1 1065.07,1520 1064.78,1522.94 1063.93,1525.77 1062.53,1528.37 1060.66,1530.66 950.66,1640.66 948.37,1642.53 945.77,1643.93 942.94,1644.78 940,1645.07 505.07,1645.07 505.07,2093.76 681.24,2269.93 1274.93,2269.93
+3.3 on PWR (split plane): 3579.93,3710 3580.22,3707.06 3581.07,3704.23 3582.47,3701.63 3584.34,3699.34 3684.34,3599.34 3686.63,3597.47 3689.23,3596.07 3692.06,3595.22 3695,3594.93 3916.91,3594.93 3916.91,385.07 3705,385.07 3702.06,384.78 3699.23,383.93 3696.63,382.53 3694.34,380.66 3609.34,295.66 3607.47,293.37 3606.07,290.77 3605.22,287.94 3604.93,285 3604.93,20.1 2640.07,20.1 2640.07,1465 2639.78,1467.94 2638.93,1470.77 2637.53,1473.37 2635.66,1475.66 2510.66,1600.66 2508.37,1602.53 2505.77,1603.93 2502.94,1604.78 2500,1605.07 1506.24,1605.07 1305.07,1806.24 1305.07,3740 1305.07,3916.91 3579.93,3916.91
+5 on PWR (split plane): 1274.93,2300.07 690.07,2300.07 690.07,2370 690.07,3724.93 1274.93,3724.93
no net on PWR (split plane): 3916.91,20.1 3635.07,20.1 3635.07,278.76 3711.24,354.93 3916.91,354.93
no net on PWR (split plane): 3916.91,3625.07 3701.24,3625.07 3610.07,3716.24 3610.07,3916.91 3916.91,3916.91

## Other copper
GND (plane layer: these items are gaps in the copper):
  lines w30: 0,450 110,450 310,450 455,305 485,275 485,0 ; 0,3530 10,3540 210,3540 375,3705 375,3940 ; 297.5,450 300,450 298.75,450 ; 1290,3940 1290,1800 1500,1590 2500,1590 2625,1465 2625,955 2625,0 3140,0 ; 3595,3945 3595,3705 3690,3610 3935,3610 3940,3615 ; 3620,0 3620,295 3700,375 3930,375
PWR (plane layer: these items are gaps in the copper):
  lines w30: 0,450 315,450 357.5,407.5 442.5,322.5 485,280 ; 15,3540 210,3540 380,3710 380,3940 ; 495,1630 940,1630 1050,1520 1050,0 1400,0 ; 1285,2285 675,2285 ; 1287.99,3937.01 0,3937.01 1292.01,3937.01 1290,3935 ; 1290,3740 675,3740 675,2370 675,2285 ; 1290,3937.01 1290,1800 1500,1590 2500,1590 2625,1465 2625,0 ; 2620,5 3065,5 ; 3595,3935 3595,3710 3695,3610 3935,3610 3945,3620 ; 3620,0 3620,285 3705,370 3940,370 ; 490,450 490,710 490,2100 675,2285 ; 490,450 490,5 490,450 ; 5,560 5,560

## Silkscreen, mask and mechanical layers (free items; w line width, h text height)
Top Overlay:
  text "STAR Star.Pt V0.3" at 1285,1820 h100
  text "1" at 1995,1530 h60
  text "2" at 1990,1100 h60
  text "3" at 2000,770 h60
  text "4" at 575,455 h60
  text "3" at 700,455 h60
  text "2" at 825,455 h60
  text "1" at 950,455 h60
  text "4" at 1995,330 h60

## Text inside footprints (layer, text, board x,y; h text height)
C2: Top Overlay "+" at 757.83,2750.32 h28.03
C8: Top Overlay "+" at 1114.68,1738.62 h28.03 r90
C12: Top Overlay "+" at 732.83,900.32 h28.03
P1: Top Overlay "-" at 90,3265 h80 r270; Top Overlay "+" at 80,3140 h80 r270